# EAGLE board COMP___PULSE-SIEM_V1 (EAGLE 9.5.1)
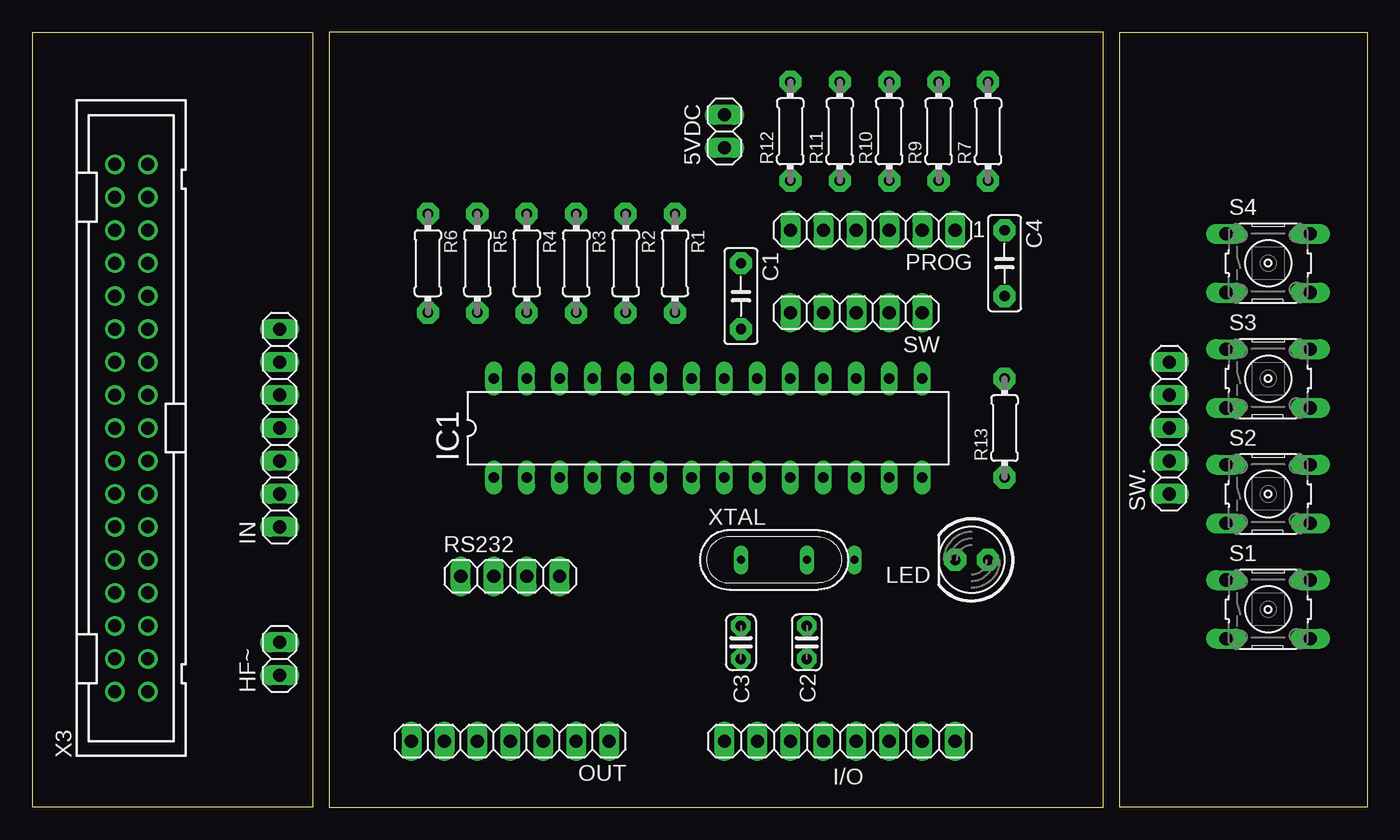
[diagram p0: board, top side]
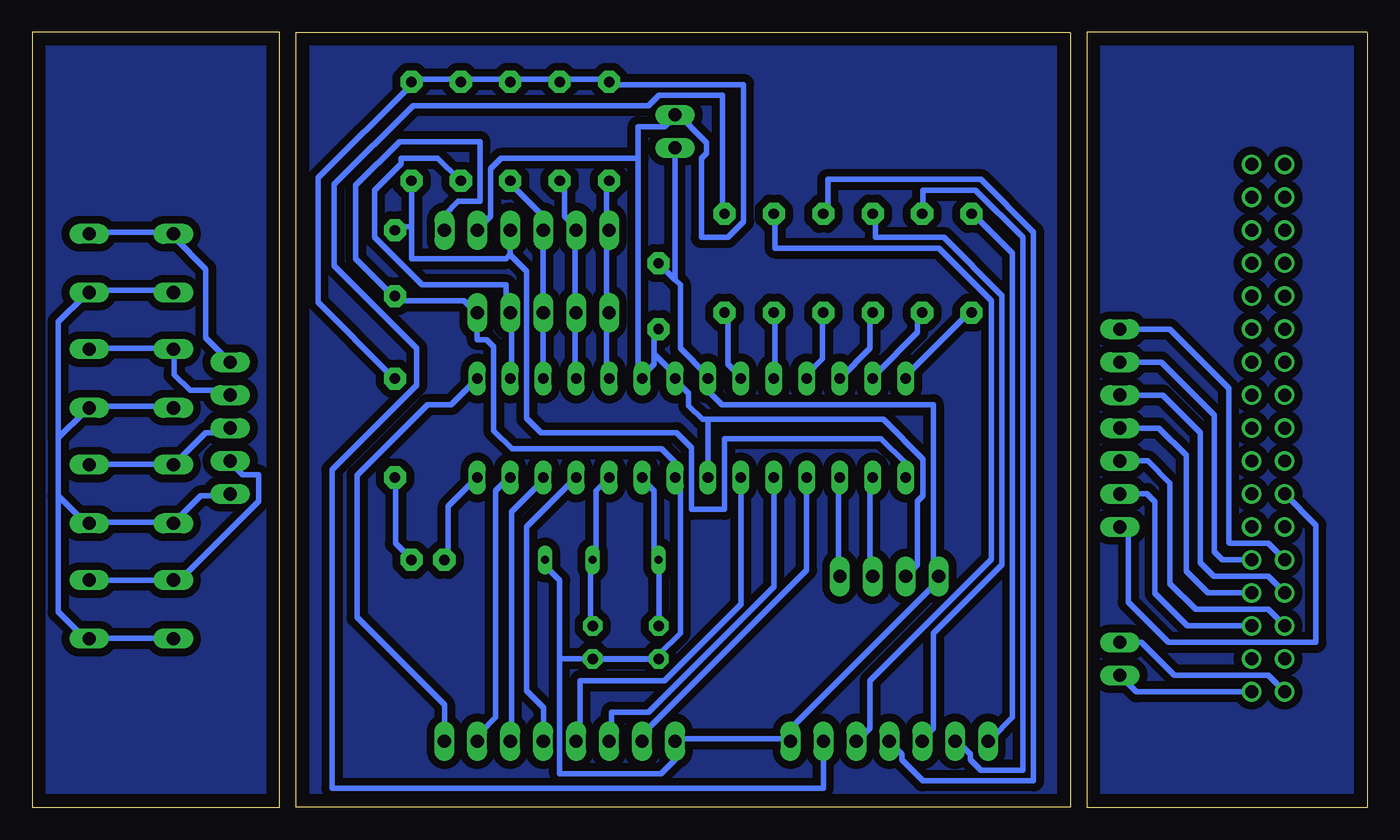
[diagram p1: board, bottom side, seen from below]

Size 102.87 x 59.69 mm. Coordinates in mm from the lower left corner, seen from the top.
Outline: 22.86,59.68 22.86,0 82.55,0 82.55,59.69 22.86,59.69
Outline: 21.59,59.68 21.59,0 0,0 0,59.68
Outline: 0,59.69 21.59,59.69
Outline: 83.82,59.69 102.87,59.69 102.87,0 83.82,0 83.82,59.69
Copper layers (1*16): Top 0.035mm / dielectric 1.5mm / Bottom 0.035mm
Design rules "default *": minimum track width 16mil, minimum drill 0.35mm, track to track 16mil, track to pad 16mil, pad to pad 16mil, via to via 16mil, smd to smd 16mil, copper to edge 40mil, drill to drill 16mil, minimum pad ring 10mil, minimum via ring 8mil, stop-mask expansion 4mil, vias tented up to drill 0mil, thermal gap 16mil

## Footprints (pad centres in the part's own frame; a part is rotated, then mirrored left to right if it is on the bottom)
1X02 = drill 1.016 long: 1 -1.27,0; 2 1.27,0
C050-025X075 = drill 0.8 pad 1.7 octagon: 1 -2.54,0; 2 2.54,0
C25-024X044 = drill 0.813 pad 1.5 octagon: 1 -1.27,0; 2 1.27,0
1X08 = drill 1.016 long: 1 -8.89,0; 2 -6.35,0; 3 -3.81,0; 4 -1.27,0; 5 1.27,0; 6 3.81,0; 7 6.35,0; 8 8.89,0
DIL28-3 = drill 0.813 long: 1 -16.51,-3.81; 2 -13.97,-3.81; 3 -11.43,-3.81; 4 -8.89,-3.81; 5 -6.35,-3.81; 6 -3.81,-3.81; 7 -1.27,-3.81; 8 1.27,-3.81; 9 3.81,-3.81; 10 6.35,-3.81; 11 8.89,-3.81; 12 11.43,-3.81; 13 13.97,-3.81; 14 16.51,-3.81; 15 16.51,3.81; 16 13.97,3.81; 17 11.43,3.81; 18 8.89,3.81; 19 6.35,3.81; 20 3.81,3.81; 21 1.27,3.81; 22 -1.27,3.81; 23 -3.81,3.81; 24 -6.35,3.81; 25 -8.89,3.81; 26 -11.43,3.81; 27 -13.97,3.81; 28 -16.51,3.81
1X07 = drill 1.016 long: 1 -7.62,0; 2 -5.08,0; 3 -2.54,0; 4 0,0; 5 2.54,0; 6 5.08,0; 7 7.62,0
LED_5MM = drill 0.8 pad 1.7 octagon: A -1.27,0; K 1.27,0
ICSP-AVR-6-PIN = drill 1.016 long: 1 -6.35,0; 2 -3.81,0; 3 -1.27,0; 4 1.27,0; 5 3.81,0; 6 6.35,0
RESISTOR_1/4_7.5 = drill 0.8 pad 1.7 octagon: 1 -3.81,0; 2 3.81,0
1X04 = drill 1.016 long: 1 -3.81,0; 2 -1.27,0; 3 1.27,0; 4 3.81,0
B3F-10XX = drill 1.016 long: 1 -3.251,2.261; 2 3.251,2.261; 3 -3.251,-2.261; 4 3.251,-2.261
1X05 = drill 1.016 long: 1 -5.08,0; 2 -2.54,0; 3 0,0; 4 2.54,0; 5 5.08,0
PAK100/2500-34 = drill 1 pad 1.422: 1 -20.32,-1.27; 2 -20.32,1.27; 3 -17.78,-1.27; 4 -17.78,1.27; 5 -15.24,-1.27; 6 -15.24,1.27; 7 -12.7,-1.27; 8 -12.7,1.27; 9 -10.16,-1.27; 10 -10.16,1.27; 11 -7.62,-1.27; 12 -7.62,1.27; 13 -5.08,-1.27; 14 -5.08,1.27; 15 -2.54,-1.27; 16 -2.54,1.27; 17 0,-1.27; 18 0,1.27; 19 2.54,-1.27; 20 2.54,1.27; 21 5.08,-1.27; 22 5.08,1.27; 23 7.62,-1.27; 24 7.62,1.27; 25 10.16,-1.27; 26 10.16,1.27; 27 12.7,-1.27; 28 12.7,1.27; 29 15.24,-1.27; 30 15.24,1.27; 31 17.78,-1.27; 32 17.78,1.27; 33 20.32,-1.27; 34 20.32,1.27
QS = drill 0.61 long: 1 -2.54,0; 2 2.54,0; GND 6.2,0

## Placement (x,y rotation side)
5VDC  [1X02]  53.34,52.07 90 top
C1  100nf  [C050-025X075]  54.61,39.37 270 top
C2  22pf  [C25-024X044]  59.69,12.7 90 top
C3  22pf  [C25-024X044]  54.61,12.7 90 top
C4  10nf  [C050-025X075]  74.93,41.91 270 top
HF~  [1X02]  19.05,11.43 90 top
I/O  [1X08]  62.23,5.08 0 top
IC1  ATMEGA328P  [DIL28-3]  52.07,29.21 0 top
IN  [1X07]  19.05,29.21 90 top
LED  [LED_5MM]  72.39,19.05 180 top
OUT  [1X07]  36.83,5.08 180 top
PROG  [ICSP-AVR-6-PIN]  64.77,44.45 180 top
R1  220R  [RESISTOR_1/4_7.5]  49.53,41.91 270 top
R2  220R  [RESISTOR_1/4_7.5]  45.72,41.91 270 top
R3  220R  [RESISTOR_1/4_7.5]  41.91,41.91 270 top
R4  220R  [RESISTOR_1/4_7.5]  38.1,41.91 270 top
R5  220R  [RESISTOR_1/4_7.5]  34.29,41.91 270 top
R6  220R  [RESISTOR_1/4_7.5]  30.48,41.91 270 top
R7  10K  [RESISTOR_1/4_7.5]  73.66,52.07 90 top
R9  10K  [RESISTOR_1/4_7.5]  69.85,52.07 90 top
R10  10K  [RESISTOR_1/4_7.5]  66.04,52.07 90 top
R11  10K  [RESISTOR_1/4_7.5]  62.23,52.07 90 top
R12  10K  [RESISTOR_1/4_7.5]  58.42,52.07 90 top
R13  1K  [RESISTOR_1/4_7.5]  74.93,29.21 90 top
RS232  [1X04]  36.83,17.78 0 top
S1  [B3F-10XX]  95.25,15.24 0 top
S2  [B3F-10XX]  95.25,24.13 0 top
S3  [B3F-10XX]  95.25,33.02 0 top
S4  [B3F-10XX]  95.25,41.91 0 top
SW  [1X05]  63.5,38.1 180 top
SW.  [1X05]  87.63,29.21 90 top
X3  [PAK100/2500-34]  7.62,29.21 90 top
XTAL  20MHZ  [QS]  57.15,19.05 0 top

## Library data of the parts
5VDC HF~ I/O IN OUT RS232 SW SW. = pinhead
C1-C4 LED PROG R1-R7 R9-R13 XTAL = 00-tecnicosotv
IC1 = atmega8
S1-S4 = switch-omron; MPN: B3F-1000; OC_FARNELL: 176432; OC_NEWARK: 36M3542
X3 = con-3m; OC_FARNELL: unknown; OC_NEWARK: unknown

## Nets
1L1+: OUT.2 R1.1
1L1-: OUT.3 R2.1
1L2+: OUT.4 R3.1
1L2-: OUT.5 R4.1
1L3+: OUT.6 R5.1
1L3-: OUT.7 R6.1
+5V: 5VDC.2 C1.2 IC1.7 IC1.20 IC1.21 PROG.2 R7.2 R9.2 R10.2 R11.2 R12.2 R13.2 RS232.2
GND: 5VDC.1 C1.1 C2.1 C3.1 C4.2 I/O.1 IC1.8 IC1.22 OUT.1 PROG.1 RS232.1 SW.1
N$1: I/O.2 IC1.4
N$2: I/O.3 IC1.5
N$3: I/O.4 IC1.6
N$4: I/O.5 IC1.11
N$5: I/O.6 IC1.12
N$6: I/O.7 IC1.13
N$7: HF~.1 X3.1
N$8: IN.2 X3.5
N$9: C2.2 IC1.10 XTAL.2
N$10: C4.1 IC1.1 PROG.3 R7.1
N$11: S1.1 S1.2 SW..2
N$12: C3.2 IC1.9 XTAL.1
N$13: HF~.2 X3.2
N$14: S2.1 S2.2 SW..3
N$15: S3.1 S3.2 SW..4
N$16: S4.1 S4.2 SW..5
N$17: IC1.23 R1.2
N$18: IC1.24 R2.2
N$19: IC1.25 R3.2
N$20: IC1.26 R4.2
N$21: IC1.27 R5.2
N$22: IC1.28 R6.2
N$23: IN.3 X3.6
N$24: IN.4 X3.7
N$25: IN.5 X3.8
N$26: IC1.14 LED.K
N$27: LED.A R13.1
N$28: S1.3 S1.4 S2.3 S2.4 S3.3 S3.4 S4.3 S4.4 SW..1
N$29: IN.6 X3.9
N$30: IN.7 X3.10
N$31: IN.1 X3.14
N$32: I/O.8 IC1.15
RX: IC1.2 RS232.3
S1: IC1.16 R9.1 SW.2
S2: IC1.17 PROG.4 R10.1 SW.3
S3: IC1.18 PROG.5 R11.1 SW.4
S4: IC1.19 PROG.6 R12.1 SW.5
TX: IC1.3 RS232.4

## Tracks (layer width: path | path; a pad name or v marks a point on that pad's centre or on a via)
1L1+
  Bottom 0.406: R1.1 49.68,45.92 49.68,54.86 54.56,54.86 55.37,54.05 73.53,54.05 79.6,47.98 79.6,41.71 73.25,35.36 73.25,32.51 79.78,25.98 79.78,1.47 41.91,1.47 OUT.2
1L1-
  Bottom 0.406: OUT.3 39.12,5.28 38.3,6.1 38.3,9.75 28.96,19.1 28.96,39.01 33.02,43.08 45.62,43.08 45.62,45.52 R2.1
1L2+
  Bottom 0.406: OUT.4 36.68,4.88 35.87,4.06 35.87,3.66 34.24,2.03 25.7,2.03 25.7,44.3 29.77,48.36 41.55,48.36 41.55,45.92 R3.1
1L2-
  Bottom 0.406: OUT.5 34.24,5.28 33.43,6.1 33.43,13.41 28.14,18.69 28.14,39.42 32.61,43.89 37.9,43.89 37.9,45.52 R4.1
1L3+
  Bottom 0.406: OUT.6 31.39,4.88 30.58,4.06 30.58,3.66 29.77,2.85 26.52,2.85 26.52,43.89 30.18,47.55 34.24,47.55 34.24,45.92 R5.1
1L3-
  Bottom 0.406: OUT.7 28.96,5.28 27.33,6.91 27.33,42.67 30.18,45.52 R6.1
+5V
  Bottom 0.406: R13.2 75.29,33.33 80.85,38.89 80.85,48.49 73.66,55.68 R7.2 73.66,56.08 70,56.08 R9.2 69.6,56.08 66.34,56.08 R10.2 65.94,56.08 62.28,56.08 R11.2 61.87,56.08 58.62,56.08 R12.2 58.22,55.68 48.06,55.68 48.06,45.11 49.28,43.89 51.31,43.89 51.31,49.99 50.9,50.39 50.9,51.21 53.34,53.65 5VDC.2 53.34,53.24 54.15,52.43 56.19,52.43 56.19,49.99 | RS232.2 34.65,18.69 34.65,23.57 34.24,23.98 34.24,26.82 37.29,29.87 50.8,29.87 | 54.97,34.95 54.97,36.58 C1.2 | 54.97,34.95 54.97,34.14 55.78,33.33 IC1.20 56.19,33.33 56.19,49.99 | 56.19,49.99 66.75,49.99 67.56,49.17 67.56,45.52 68.38,44.7 PROG.2 | 54.97,34.95 53.34,33.33 IC1.21 53.34,32.92 52.3,31.88 52.3,30.94 51.23,29.87 50.8,29.87 | IC1.7 50.8,29.87
ABB
  pour Bottom (isolate 0.61): 0,0 21.59,0 21.59,59.69 0,59.69
ABC
  pour Bottom (isolate 0.61): 22.86,0 82.55,0 82.55,59.69 22.86,59.69
ABF
  pour Bottom (isolate 0.61): 83.82,0 102.87,0 102.87,59.69 83.82,59.69
GND
  Bottom 0.406: 74.91,39.21 74.88,39.01 69.6,39.01 68.78,38.2 SW.1 68.58,36.04 68.56,36.02 67.87,36.02 67.31,35.46 67.31,29.01 65.91,27.61 54.38,27.61 53.34,26.57 IC1.8 53.34,25.2 52.93,24.79 52.93,13.41 54.56,11.79 C3.1 | 74.91,39.21 C4.2 | C2.1 59.44,11.38 54.97,11.38 C3.1 | C1.1 53.34,40.64 | 53.34,40.64 52.93,40.23 52.93,35.36 50.9,33.33 IC1.22 | 53.34,40.64 5VDC.1 | 33.43,17.07 44.4,6.1 44.4,5.28 OUT.1 44.81,5.28 53.34,5.28 I/O.1 53.34,3.66 54.41,2.59 62.23,2.59 62.23,11.43 | 33.43,17.07 33.02,17.48 RS232.1 33.43,17.07 | 50.5,32.92 IC1.22 | 63.4,19.13 63.4,18.64 62.23,17.48 62.23,11.43 | C3.1 62.23,11.43 | PROG.1 71.12,45.62 70.05,46.69 68.38,46.69 68.38,51.28 74.57,51.28 77.95,47.9 77.95,42.26 74.91,39.21 | IC1.22 50.8,32.08 49.73,31.01 33.43,31.01 33.43,17.07
N$1
  Bottom 0.406: I/O.2 55.78,5.28 55.78,5.69 43.2,18.26 43.2,25.38 IC1.4
N$2
  Bottom 0.406: I/O.3 58.22,5.28 58.22,7.32 55.37,7.32 45.72,16.97 IC1.5
N$3
  Bottom 0.406: I/O.4 60.66,5.28 60.66,9.75 54.15,9.75 48.26,15.65 IC1.6
N$4
  Bottom 0.406: IC1.11 64.77,21.59 64.77,8.97 63.48,7.67 63.48,5.11 I/O.5
N$5
  Bottom 0.406: IC1.12 63.5,25.2 65.94,22.76 65.94,5.28 I/O.6
N$6
  Bottom 0.406: IC1.13 66.34,25.2 67.16,24.38 67.16,6.91 68.38,5.69 68.38,5.28 I/O.7
N$7
  Bottom 0.406: X3.1 17.78,8.89 HF~.1
N$8
  Bottom 0.406: IN.2 16.99,24.13 16.97,24.16 16.36,23.55 16.36,16.48 13.84,13.97 X3.5
N$9
  Bottom 0.406: C2.2 59.84,14.22 59.84,18.69 XTAL.2 59.44,19.1 59.44,24.38 IC1.10
N$10
  Bottom 0.406: R7.1 73.66,44.7 | 73.66,44.7 73.66,42.27 66.37,42.27 66.02,42.62 66.04,42.65 PROG.3 66.04,42.55 64.77,41.27 64.77,29.95 63.68,28.85 53.24,28.85 52.07,27.69 52.07,22.94 49.53,22.94 49.53,28.4 37.47,28.4 35.56,26.49 IC1.1 | 73.66,44.7 74.88,44.7 C4.1
N$11
  Bottom 0.406: SW..2 87.48,26.42 86.66,25.6 85.45,25.6 85.45,23.57 91.14,17.88 91.95,17.88 S1.1 92.35,17.48 98.45,17.48 S1.2
N$12
  Bottom 0.406: C3.2 54.56,14.22 54.56,18.69 XTAL.1 54.97,19.1 54.97,24.38 55.78,25.2 IC1.9
N$13
  Bottom 0.406: X3.2 7.62,10.16 14.86,10.16 17.4,12.7 HF~.2
N$14
  Bottom 0.406: SW..3 87.88,28.85 89.51,28.85 91.95,26.42 S2.1 92.35,26.42 98.45,26.42 S2.2
N$15
  Bottom 0.406: SW..4 87.88,32.11 90.73,32.11 91.95,33.33 91.95,34.95 S3.1 92.35,35.36 98.45,35.36 S3.2
N$16
  Bottom 0.406: SW..5 89.51,36.17 89.51,41.45 91.95,43.89 S4.1 92.35,44.3 98.45,44.3 S4.2
N$17
  Bottom 0.406: IC1.23 48.46,33.33 49.28,34.14 49.28,37.8 R1.2
N$18
  Bottom 0.406: IC1.24 45.62,33.33 45.62,37.8 R2.2
N$19
  Bottom 0.406: IC1.25 43.18,33.33 41.96,34.54 41.96,37.8 R3.2
N$20
  Bottom 0.406: IC1.26 38.3,35.36 38.3,37.8 R4.2
N$21
  Bottom 0.406: IC1.27 37.9,33.33 34.65,36.58 34.65,37.8 R5.2
N$22
  Bottom 0.406: IC1.28 35.46,33.33 30.58,38.2 R6.2
N$23
  Bottom 0.406: X3.6 7.62,15.24 13.21,15.24 15.19,17.22 15.19,24.94 16.92,26.67 IN.3
N$24
  Bottom 0.406: X3.7 12.29,16.51 13.95,18.16 13.95,27.1 16.05,29.21 IN.4
N$25
  Bottom 0.406: X3.8 7.62,17.78 11.81,17.78 12.85,18.82 12.85,28.85 15.75,31.75 IN.5
N$26
  Bottom 0.406: IC1.14 70.81,23.16 70.81,19.1 LED.K
N$27
  Bottom 0.406: LED.A 73.66,19.1 74.88,20.32 74.88,25.2 R13.1
N$28
  Bottom 0.406: SW..1 87.88,23.98 89.92,23.98 91.95,21.95 S2.3 92.35,21.95 98.45,21.95 S2.4 98.86,21.95 100.89,23.98 | S4.3 92.35,39.83 98.45,39.83 S4.4 98.86,39.42 100.89,37.39 100.89,28.45 | S1.3 92.35,13.01 98.45,13.01 S1.4 98.86,13.01 100.89,15.04 100.89,23.98 | 100.89,28.45 100.89,23.98 | 100.89,28.45 98.86,30.48 S3.4 98.45,30.89 92.35,30.89 S3.3
N$29
  Bottom 0.406: X3.9 11.18,19.05 11.79,19.66 11.79,30.2 15.88,34.29 IN.6
N$30
  Bottom 0.406: X3.10 7.62,20.32 10.59,20.32 10.64,20.37 10.64,32.26 15.21,36.83 IN.7
N$31
  Bottom 0.406: IN.1 18.41,20.95 18.41,15.8 15.32,12.7 3.94,12.7 3.94,21.72 X3.14
N$32
  Bottom 0.406: IC1.15 70.59,31.01 72.41,31.01 77.85,25.58 77.85,14.63 71.12,7.9 I/O.8
RX
  Bottom 0.406: IC1.2 38.3,25.2 38.3,17.88 RS232.3
S1
  Bottom 0.406: IC1.16 65.94,33.33 65.94,37.8 SW.2 66.34,38.2 66.34,40.23 68.5,40.23 | 68.5,40.23 72.85,40.23 76.5,43.89 76.5,47.55 74.47,49.58 74.47,49.99 71.63,49.99 70,48.36 R9.1 | 68.5,40.23
S2
  Bottom 0.406: IC1.17 SW.3 PROG.4 63.5,45.52 65.94,47.95 R10.1
S3
  Bottom 0.406: IC1.18 61.06,33.33 61.06,37.8 SW.4 61.06,38.2 61.06,44.3 PROG.5 61.06,44.7 61.87,45.52 61.87,47.95 R11.1
S4
  Bottom 0.406: R12.1 58.62,47.95 58.62,44.7 PROG.6 58.62,44.3 58.62,38.2 SW.5 58.62,37.8 58.62,33.33 IC1.19
TX
  Bottom 0.406: IC1.3 40.74,25.2 40.74,17.88 RS232.4

## Text on the board
tValues: 1 | 1 | 1 | 1 | 1 | 1 | 1 | 1 | 1